# Altium PCB PCB2-Tubes.PcbDoc
Units mm, origin at the board's own origin, x right, y up, seen from the top; angles counter-clockwise.
Board outline 210 x 70 mm, 2 copper layers (Top Layer, Bottom Layer); 8 components, 97 nets, 94 pads, 0 vias.
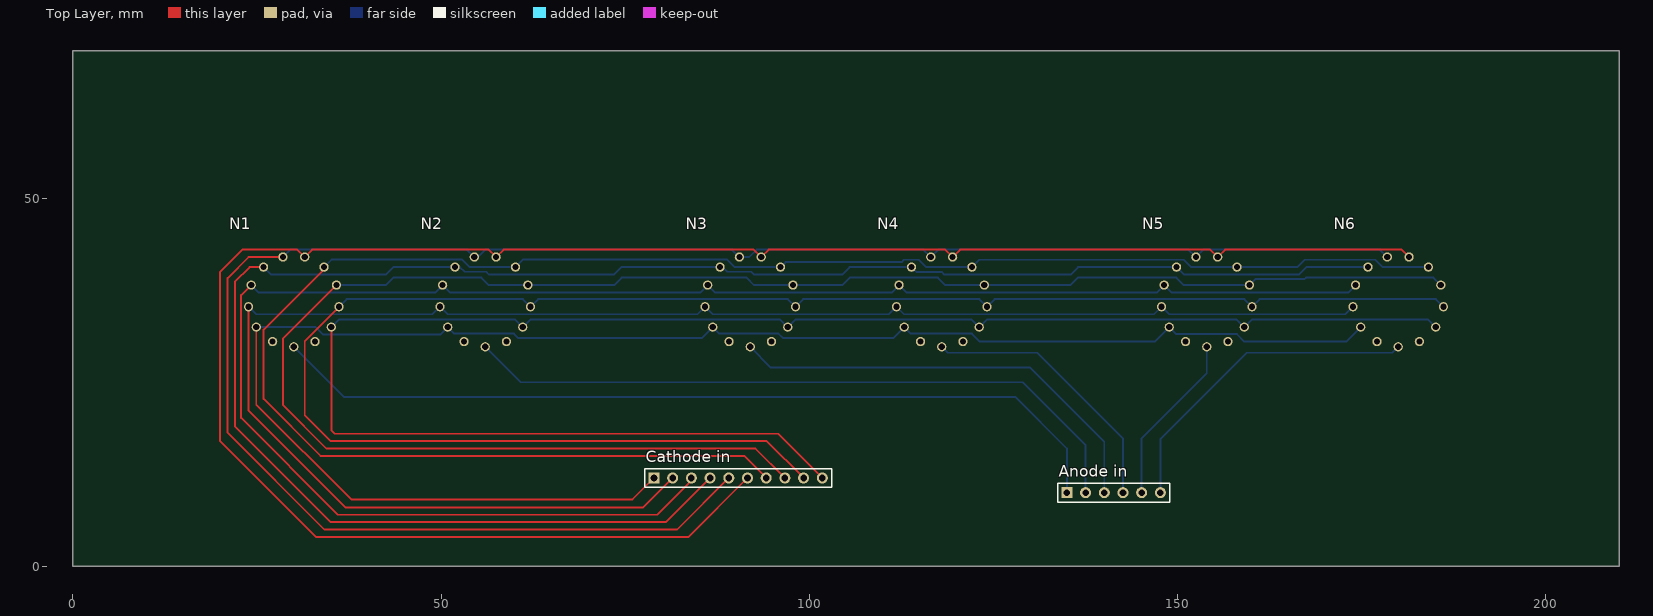
[diagram p0: Top Layer view]
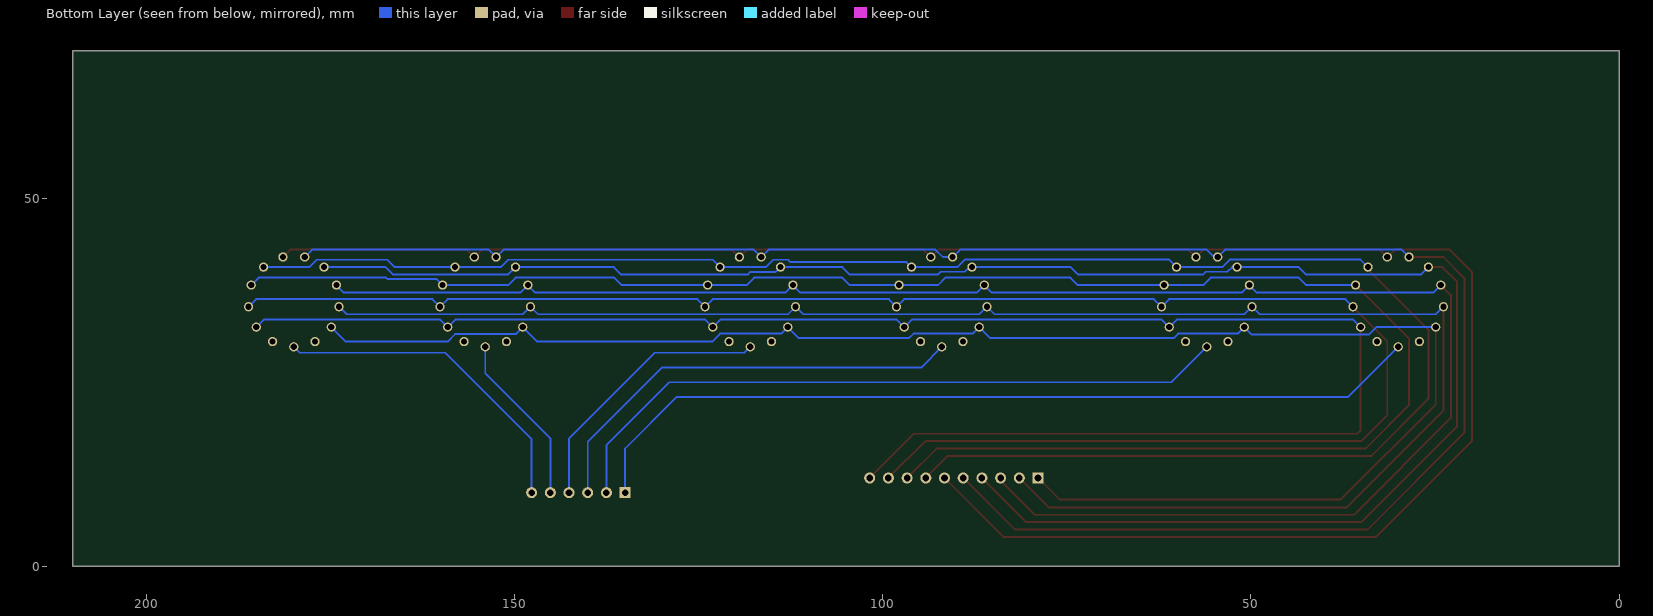
[diagram p1: Bottom Layer view, seen from below]

## Layer stack, top to bottom
Top Solder: solder mask 0.0102, Solder Resist, Dk 3.5
Top Layer: signal copper 0.0356
Dielectric 1: dielectric 0.32, FR-4, Dk 4.8
Bottom Layer: signal copper 0.0356
Bottom Solder: solder mask 0.0102, Solder Resist, Dk 3.5

## Board outline
0,0 0,70 210,70 210,0

## Design rules (kind name [scope] priority, off if disabled: settings)
Clearance [All] p1: gap=0.254 ignorepadtopadclearanceinfootprint=FALSE except(0: Arc-Hole Track-Hole SMDPad-Hole THPad-Hole Via-Hole Fill-Hole Poly-Hole Region-Hole Text-Hole)
PolygonConnect [All] p1: connectstyle=Relief reliefconductorwidth=0.254 reliefentries=4 polygonreliefangle="90 Angle" airgapwidth=0.254
RoutingVias [All] p1: holewidth=0.711 width=1.27 viastyle="Through Hole" minholewidth=0.711 minwidth=1.27 maxholewidth=0.711 maxwidth=1.27
SolderMaskExpansion [All] p1: expansion=0.102 istentingtop=FALSE
Width [All] p1: maxlimit=0.254 minlimit=0.254 preferedwidth=0.254
30 further rules are at their usual default settings.

## Components (designator, comment, footprint, x,y, rotation, side; value= is the part's Value field where it differs from the comment)
"Anode in" "Header 6" HDR1X6 135,10 r0 top
"Cathode in" "Header 10" HDR1X10 78.92,12 r0 top
N1 "H1" IN-14 30,36 r0 top
N2 "H2" IN-14 56,36 r0 top
N3 "M1" IN-14 92,36 r0 top
N4 "M2" IN-14 118,36 r0 top
N5 "S1" IN-14 154,36 r0 top
N6 "S2" IN-14 180,36 r0 top

## Footprints (in the part's own frame and the unit in brackets; to place one, negate y for a bottom-side part, rotate by r counter-clockwise, add the part's x,y. Pads: shape width x height; smd on the part's side, far side on the other; paste and mask are expansions set on the pad)
HDR1X6 [mm] "Connector; Header; 6 Position"
  rect 1.5x1.5 hole 0.9: 1(0,0)
  round 1.5 hole 0.9: 2(2.54,0) 3(5.08,0) 4(7.62,0) 5(10.16,0) 6(12.7,0)
  silkscreen extent -1.27,-1.27 13.97,1.27
HDR1X10 [mm] "Connector; Header; 10 Position"
  rect 1.5x1.5 hole 0.9: 1(0,0)
  round 1.5 hole 0.9: 2(2.54,0) 3(5.08,0) 4(7.62,0) 5(10.16,0) 6(12.7,0) 7(15.24,0) 8(17.78,0) 9(20.32,0) 10(22.86,0)
  silkscreen extent -1.27,-1.27 24.13,1.27
IN-14 [mm]
  round 1.26 / inner round 1.524 / far side round 1.26 hole 0.84: 0(5.094,-3.516) 1(-5.094,-3.516) 2(-6.145,-0.746) 3(-5.788,2.195) 4(-4.105,4.633) 5(-1.481,6.01) 6(1.481,6.01) 7(4.105,4.633) 8(5.788,2.195) 9(6.145,-0.746) A(0,-6.19) LHDP(2.877,-5.481) RHDP(-2.877,-5.481)

## Part data
"Anode in": "Header, 6-Pin", LatestRevisionDate=17-Jul-2002, LatestRevisionNote="Re-released for DXP Platform.", Publisher="Altium Limited"
"Cathode in": "Header, 10-Pin", LatestRevisionDate=17-Jul-2002, LatestRevisionNote="Re-released for DXP Platform.", Publisher="Altium Limited"
N1 N2 N3 N4 N5 N6: library part IN-14, DeviceSetName=IN-14, GateName_1=G$1, LibraryName=russian-nixies, Package=IN-14, SymbolName_1=IN-14

## Nets (pads, with @x,y where several pads share a name; then routed paths per layer and width w, separated by ;. In a path a pad name is that pad's centre, name@x,y a point inside that pad or via, vN(x,y) a via of type N, cw(c..) or ccw(c..) an arc to the next point about the centre after c; other vN are vias at no path point)
1: 
+5: 
"Net9V/12-35V DC-IN_1": 
"Net9V/12-35V DC-IN_3": 
"NetAnode in_1": "Anode in.1" N1.A | length 116.7
  Bottom Layer w0.254: N1.A 36.81,23 128,23 135,16 135,10
"NetAnode in_2": "Anode in.2" N2.A | length 93.5
  Bottom Layer w0.254: N2.A 60.81,25 129,25 137.54,16.46 137.54,10
"NetAnode in_3": "Anode in.3" N3.A | length 60.3
  Bottom Layer w0.254: N3.A 94.81,27 130,27 140.08,16.92 140.08,10
"NetAnode in_4": "Anode in.4" N4.A | length 37.1
  Bottom Layer w0.254: N4.A 118.81,29 131,29 142.62,17.38 142.62,10
"NetAnode in_5": "Anode in.5" N5.A | length 23.5
  Bottom Layer w0.254: 145.16,10 145.16,17.38 154,26.22 N5.A
"NetAnode in_6": "Anode in.6" N6.A | length 44.8
  Bottom Layer w0.254: 147.7,10 147.7,17.286 159.414,29 179.19,29 N6.A
NetAnode_1: 
NetAnode_2: 
NetAnode_3: 
NetAnode_4: 
NetAnode_5: 
NetAnode_6: 
NetC1_1: 
NetC2_1: 
NetC3_1: 
NetC4_1: 
NetC5_1: 
NetC6_2: 
NetC8_1: 
NetC9_1: 
NetCathode_1: 
NetCathode_2: 
NetCathode_3: 
NetCathode_4: 
NetCathode_5: 
NetCathode_6: 
NetCathode_7: 
NetCathode_8: 
NetCathode_9: 
NetCathode_10: 
NetD2_1: 
NetD2_2: 
NetD3_2: 
NetD4_1: 
NetD4_2: 
NetD19_2: 
NetIC1_3: 
NetIC1_4: 
NetIC1_6: 
NetIC1_7: 
NetIC2_5: 
NetIC2_7: 
NetIC3_1: 
NetIC3_13: 
NetIC3_14: 
NetIC3_15: 
NetIC3_16: 
NetIC3_17: 
NetIC3_18: 
NetIC3_19: 
NetIC3_23: 
NetIC3_24: 
NetIC3_27: 
NetIC3_28: 
NetLS1_1: 
NetPowerled1_1: 
NetQ1_2: 
NetQ1_3: 
NetQ2_2: 
NetQ2_3: 
NetQ3_2: 
NetQ3_3: 
NetQ4_2: 
NetQ4_3: 
NetQ5_2: 
NetQ5_3: 
NetQ6_2: 
NetQ6_3: 
NetQ7_2: 
NetQ7_3: 
NetQ8_2: 
NetQ8_3: 
NetQ9_2: 
NetQ9_3: 
NetQ10_2: 
NetQ10_3: 
NetQ11_2: 
NetQ11_3: 
NetQ12_2: 
NetQ12_3: 
NetQ14_2: 
NetR27_2: 
NetR28_1: 
"Nixie 0": "Cathode in.10" N1.0 N2.0 N3.0 N4.0 N5.0 N6.0 | length 237.7
  Top Layer w0.254: N1.0 35.094,18.486 35.58,18 95.78,18 101.78,12
  Bottom Layer w0.254: N1.0 36.13,33.52 60.058,33.52 N2.0 62.13,33.52 96.058,33.52 N3.0 98.13,33.52 122.058,33.52 N4.0 124.13,33.52 158.058,33.52 N5.0 160.13,33.52 184.058,33.52 N6.0
"Nixie 1": "Cathode in.1" N1.1 N2.1 N3.1 N4.1 N5.1 N6.1 | length 227.6
  Top Layer w0.254: N1.1 24.906,21.971 37.797,9.08 76,9.08 78.92,12
  Bottom Layer w0.254: N1.1 32.961,32.484 33.983,31.462 49.885,31.462 N2.1 51.775,31.615 59.891,31.615 60.505,31 85.422,31 N3.1 87.775,31.615 95.832,31.615 96.446,31 111.422,31 N4.1 113.775,31.615 122.095,31.615 123.191,30.519 146.941,30.519 N5.1 149.859,31.53 158.105,31.53 159.116,30.519 172.941,30.519 N6.1
"Nixie 2": "Cathode in.2" N1.2 N2.2 N3.2 N4.2 N5.2 N6.2 | length 233.1
  Top Layer w0.254: N1.2 23.855,21.145 37,8 77.46,8 81.46,12
  Bottom Layer w0.254: N1.2 24.878,34.231 48.832,34.231 N2.2 50.878,34.231 84.832,34.231 N3.2 86.878,34.231 110.832,34.231 N4.2 112.878,34.231 146.832,34.231 N5.2 148.878,34.231 172.832,34.231 N6.2
"Nixie 3": "Cathode in.3" N1.3 N2.3 N3.3 N4.3 N5.3 N6.3 | length 241.7
  Top Layer w0.254: N1.3 22.844,36.827 22.844,20.156 36,7 79.38,7 83.81,11.43 83.81,11.81 84,12
  Bottom Layer w0.254: N1.3 25.23,37.177 49.195,37.177 N2.3 51.23,37.177 85.195,37.177 N3.3 87.23,37.177 111.195,37.177 N4.3 113.23,37.177 147.195,37.177 N5.3 149.23,37.177 173.195,37.177 N6.3
"Nixie 4": "Cathode in.4" N1.4 N2.4 N3.4 N4.4 N5.4 N6.4 | length 251
  Top Layer w0.254: N1.4 24,40.633 22,38.633 22,19 35,6 80.54,6 86.54,12
  Bottom Layer w0.254: N1.4 26.913,39.616 42.49,39.616 43.508,40.633 N2.4 52.557,40.633 53.19,40 56.128,40 56.512,39.616 73.478,39.616 74.496,40.633 N3.4 88.225,40.633 88.858,40 92.145,40 92.53,39.616 104.466,39.616 105.484,40.633 N4.4 114.545,39.983 118.006,39.983 118.373,39.616 135.506,39.616 136.524,40.633 N5.4 150.913,39.616 166.494,39.616 167.512,40.633 N6.4
"Nixie 5": "Cathode in.5" N1.5 N2.5 N3.5 N4.5 N5.5 N6.5 | length 260.5
  Top Layer w0.254: N1.5 23.854,42.01 21,39.156 21,18.149 34.149,5 82.08,5 89.08,12
  Bottom Layer w0.254: N1.5 29.53,43.021 53.508,43.021 N2.5 ; N2.5@54.519,41.507 54.77,41.759 56.033,43.021 89.508,43.021 N3.5 91.84,42.01 92.851,43.021 115.508,43.021 N4.5 117.53,43.021 151.508,43.021 152.352,42.176 N5.5 153.53,43.021 177.508,43.021 N6.5
"Nixie 6": "Cathode in.6" N1.6 N2.6 N3.6 N4.6 N5.6 N6.6 | length 270.7
  Top Layer w0.254: 91.62,12 83.62,4 33,4 20,17 20,40 23.021,43.021 30.47,43.021 N1.6 32.492,43.021 56.47,43.021 N2.6 58.492,43.021 92.47,43.021 N3.6 94.492,43.021 118.47,43.021 N4.6 120.492,43.021 154.47,43.021 N5.6 156.492,43.021 180.47,43.021 N6.6
"Nixie 7": "Cathode in.7" N1.7 N2.7 N3.7 N4.7 N5.7 N6.7 | length 248.2
  Top Layer w0.254: N1.7 34.105,40.361 25.895,32.152 25.895,22.729 33.624,15 91.16,15 94.16,12
  Bottom Layer w0.254: N1.7 35.119,41.648 52.867,41.648 53.881,40.633 N2.7 61.119,41.648 88.858,41.648 89.873,40.633 N3.7 96.789,41.318 112.548,41.318 112.875,41.644 114.871,41.644 115.883,40.633 N4.7 123.116,41.644 150.899,41.644 151.91,40.633 N5.7 166.318,40.633 167.329,41.644 176.908,41.644 177.919,40.633 N6.7
"Nixie 8": "Cathode in.8" N1.8 N2.8 N3.8 N4.8 N5.8 N6.8 | length 245.8
  Top Layer w0.254: N1.8 28.519,30.926 28.519,21.918 34.437,16 92.7,16 96.7,12
  Bottom Layer w0.254: N1.8 42.493,38.195 43.508,39.209 55.473,39.209 56.487,38.195 N2.8 73.507,38.195 74.521,39.209 91.49,39.209 92.504,38.195 N3.8 104.495,38.195 105.509,39.209 117.474,39.209 118.488,38.195 N4.8 135.481,38.195 136.495,39.209 149.884,39.209 150.899,38.195 N5.8 160.593,39 167.274,39 167.483,39.209 184.773,39.209 N6.8
"Nixie 9": "Cathode in.9" N1.9 N2.9 N3.9 N4.9 N5.9 N6.9 | length 242.2
  Top Layer w0.254: N1.9 31.481,30.591 31.481,20.519 35,17 94.24,17 99.24,12
  Bottom Layer w0.254: N1.9 37.179,36.288 61.11,36.288 N2.9 63.179,36.288 97.11,36.288 N3.9 99.179,36.288 123.11,36.288 N4.9 125.179,36.288 159.11,36.288 N5.9 161.179,36.288 185.11,36.288 N6.9
pads on no net: N1.LHDP N1.RHDP N2.LHDP N2.RHDP N3.LHDP N3.RHDP N4.LHDP N4.RHDP N5.LHDP N5.RHDP N6.LHDP N6.RHDP

## Silkscreen, mask and mechanical layers (free items; w line width, h text height)
Bord_outline:
  the board outline again, w0.254